# EAGLE board ninjaNIRS_TriggerBox_Rev1a (EAGLE 7.7.0)
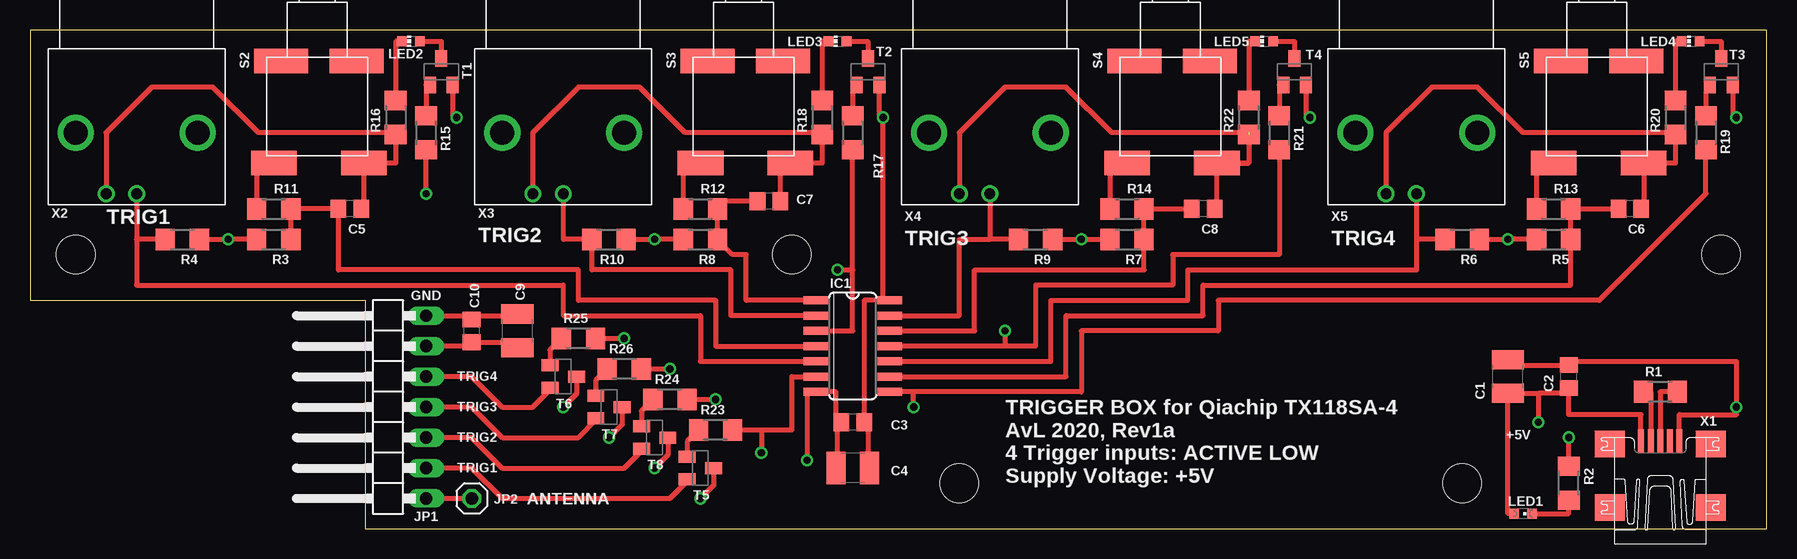
[diagram p0: board, top side]
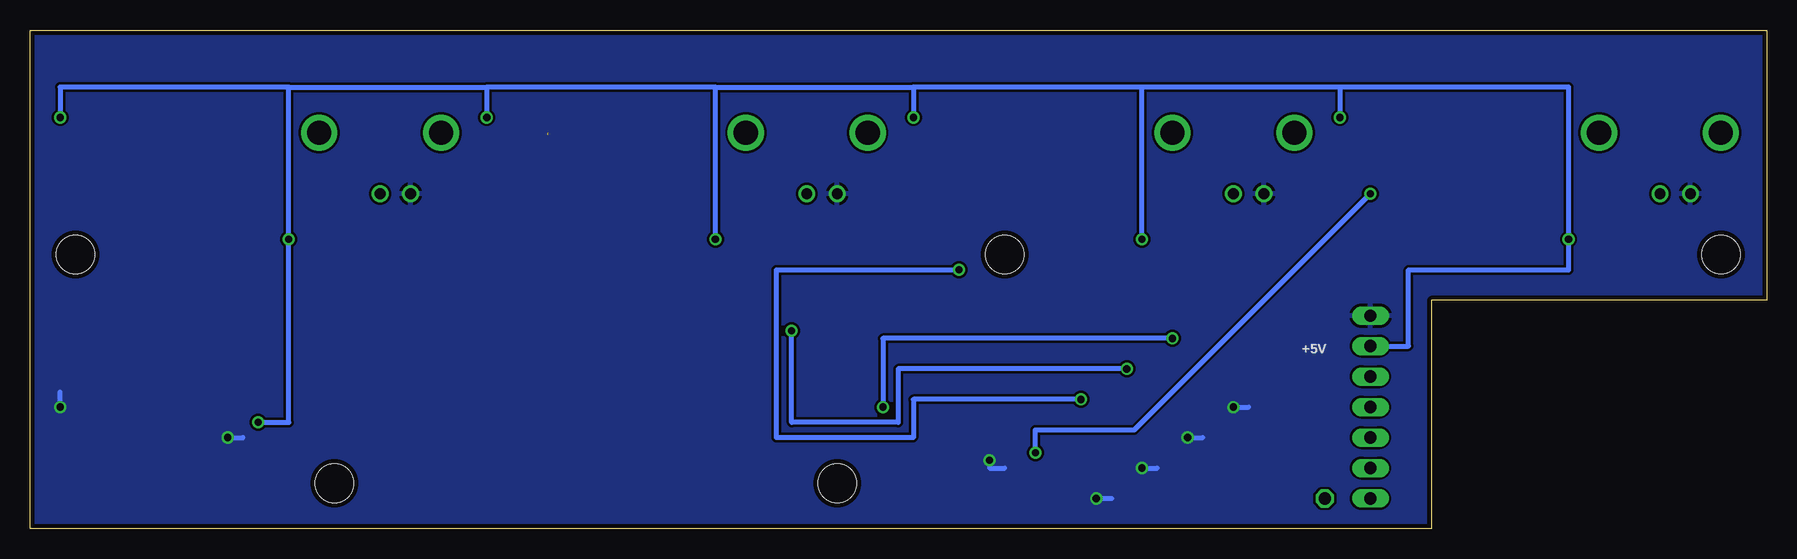
[diagram p1: board, bottom side, seen from below]

Size 144.76 x 41.58 mm. Coordinates in mm from the lower left corner, seen from the top.
Outline: 27.94,0 144.76,0 144.76,41.58 0,41.58 0,19.05 27.94,19.05 27.94,0
Copper layers (1*16): Top 0.035mm / dielectric 1.5mm / Bottom 0.035mm
Design rules "default *": minimum track width 10mil, minimum drill 12mil, track to track 8mil, track to pad 8mil, pad to pad 8mil, via to via 8mil, smd to smd 8mil, copper to edge 15mil, drill to drill 8mil, minimum pad ring 10mil, minimum via ring 8mil, stop-mask expansion 4mil, vias tented up to drill 0mil, thermal gap 10mil
Holes 3.2 mm at 3.81,22.86 140.97,22.86 63.5,22.86 77.47,3.81 119.38,3.81

## Footprints (pad centres in the part's own frame; a part is rotated, then mirrored left to right if it is on the bottom)
C1210 = smd 1.6 x 2.7: 1 -1.4,0; 2 1.4,0
C0805 = smd 1.3 x 1.5: 1 -0.95,0; 2 0.95,0
SO14 = smd 0.66 x 2.032: 1 -3.81,-3.073; 2 -2.54,-3.073; 3 -1.27,-3.073; 4 0,-3.073; 5 1.27,-3.073; 6 2.54,-3.073; 7 3.81,-3.073; 8 3.81,3.073; 9 2.54,3.073; 10 1.27,3.073; 11 0,3.073; 12 -1.27,3.073; 13 -2.54,3.073; 14 -3.81,3.073
1X07/90 = drill 1.016 long: 1 -7.62,-3.81; 2 -5.08,-3.81; 3 -2.54,-3.81; 4 0,-3.81; 5 2.54,-3.81; 6 5.08,-3.81; 7 7.62,-3.81
1X01 = drill 1.016 octagon: 1 0,0
CHIPLED_0603 = smd 0.8 x 0.8: A 0,-0.75; C 0,0.75
CHIP-LED0603 = smd 0.8 x 0.8: A 0,-0.75; C 0,0.75
R1206 = smd 1.6 x 1.803: 1 -1.422,0; 2 1.422,0
E-SWITCH_800BW = smd 3.81 x 2.03: P$1 -3.8,-3.8; P$2 3.692,-3.8 | smd 4.5 x 2.03: P$3 -3.2,4.692; P$4 3.092,4.692
SOT23-BEC = smd 1 x 1.4: B -0.95,-1.1; C 0,1.1; E 0.95,-1.1
UX60A-MB-5ST = smd 2 x 0.5: 1 2.25,1.6; 2 2.25,0.8; 3 2.25,0; 4 2.25,-0.8; 5 2.25,-1.6 | smd 2.2 x 2.5: M1 -3.3,-4.2; M2 -3.3,4.2; M3 2,4.2; M4 2,-4.2
TE_CON_BNC_5227161-9 = drill 2.01: P$1 0,0; P$2 10.16,0 | drill 0.89: P$3 2.54,-5.08; P$4 5.08,-5.08

## Placement (x,y rotation side)
C1  10uF  [C1210]  123.19,12.7 90 top
C2  100nF  [C0805]  128.27,12.7 90 top
C3  100nF  [C0805]  68.58,8.89 180 top
C4  10uF  [C1210]  68.58,5.08 180 top
C5  47n  [C0805]  26.67,26.67 180 top
C6  47n  [C0805]  133.35,26.67 180 top
C7  47n  [C0805]  61.59,27.3 180 top
C8  47n  [C0805]  97.79,26.67 180 top
C9  10uF  [C1210]  40.64,16.51 90 top
C10  100nF  [C0805]  36.83,16.51 90 top
IC1  SN74HCS08-Q1  [SO14]  68.58,15.24 270 top
JP1  CONN RCPT 7POS 0.1" GOLD PCB R/A  [1X07/90]  29.21,10.16 90 top
JP2  Antenna  [1X01]  36.83,2.54 0 top
LED1  LTST-C191KGKT  [CHIPLED_0603]  124.46,1.27 270 top
LED2  Kingbright APA1606QBC/D  [CHIP-LED0603]  31.75,40.64 90 top
LED3  Kingbright APA1606QBC/D  [CHIP-LED0603]  67.31,40.64 90 top
LED4  Kingbright APA1606QBC/D  [CHIP-LED0603]  138.43,40.64 90 top
LED5  Kingbright APA1606QBC/D  [CHIP-LED0603]  102.87,40.64 90 top
R1  100  [R1206]  135.89,11.43 0 top
R2  1k  [R1206]  128.27,3.81 270 top
R3  10k  [R1206]  20.32,24.13 180 top
R4  10k  [R1206]  12.7,24.13 180 top
R5  10k  [R1206]  127,24.13 180 top
R6  10k  [R1206]  119.38,24.13 180 top
R7  10k  [R1206]  91.44,24.13 180 top
R8  10k  [R1206]  55.88,24.13 180 top
R9  10k  [R1206]  83.82,24.13 180 top
R10  10k  [R1206]  48.26,24.13 180 top
R11  39  [R1206]  20.32,26.67 180 top
R12  39  [R1206]  55.88,26.67 180 top
R13  39  [R1206]  127,26.67 180 top
R14  39  [R1206]  91.44,26.67 180 top
R15  1k  [R1206]  33.02,33.02 90 top
R16  100  [R1206]  30.48,34.29 90 top
R17  1k  [R1206]  68.58,33.02 90 top
R18  100  [R1206]  66.04,34.29 90 top
R19  1k  [R1206]  139.7,33.02 90 top
R20  100  [R1206]  137.16,34.29 90 top
R21  1k  [R1206]  104.14,33.02 90 top
R22  100  [R1206]  101.6,34.29 90 top
R23  1k  [R1206]  57.15,8.26 0 top
R24  1k  [R1206]  53.34,10.79 0 top
R25  1k  [R1206]  45.72,15.88 0 top
R26  1k  [R1206]  49.53,13.34 0 top
S2  E-SWITCH-800BWSP9SM6RE  [E-SWITCH_800BW]  24.13,34.29 0 top
S3  E-SWITCH-800BWSP9SM6RE  [E-SWITCH_800BW]  59.69,34.29 0 top
S4  E-SWITCH-800BWSP9SM6RE  [E-SWITCH_800BW]  95.25,34.29 0 top
S5  E-SWITCH-800BWSP9SM6RE  [E-SWITCH_800BW]  130.81,34.29 0 top
T1  PNP MMBT3906  [SOT23-BEC]  34.29,38.1 0 top
T2  PNP MMBT3906  [SOT23-BEC]  69.85,38.1 0 top
T3  PNP MMBT3906  [SOT23-BEC]  140.97,38.1 0 top
T4  PNP MMBT3906  [SOT23-BEC]  105.41,38.1 0 top
T5  PNP MMBT3906  [SOT23-BEC]  55.88,5.08 270 top
T6  PNP MMBT3906  [SOT23-BEC]  44.45,12.7 270 top
T7  PNP MMBT3906  [SOT23-BEC]  48.26,10.16 270 top
T8  PNP MMBT3906  [SOT23-BEC]  52.07,7.62 270 top
X1  MINI-USB-UX60A-MB-5ST  [UX60A-MB-5ST]  135.89,5.08 90 top
X2  TE_CON_BNC_5227161-9  [TE_CON_BNC_5227161-9]  3.81,33.02 0 top
X3  TE_CON_BNC_5227161-9  [TE_CON_BNC_5227161-9]  39.37,33.02 0 top
X4  TE_CON_BNC_5227161-9  [TE_CON_BNC_5227161-9]  74.93,33.02 0 top
X5  TE_CON_BNC_5227161-9  [TE_CON_BNC_5227161-9]  110.49,33.02 0 top

## Library data of the parts
C1-C10 R1-R26 = rcl
IC1 = 74xx-eu
JP1 JP2 = pinhead
LED1-LED5 = led
S2-S5 = E-SWITCH-800BW
T1-T8 = transistor
X1 = con-hirose; OC_FARNELL: unknown; OC_NEWARK: unknown
X2-X5 = TE_CON_BNC_5227161-9

## Nets
+5V: C1.1 C2.1 C3.1 C4.1 C9.1 C10.1 IC1.14 JP1.6 LED1.A R3.2 R4.1 R5.2 R6.1 R7.2 R8.2 R9.1 R10.1 T1.E T2.E T3.E T4.E X1.1
GND: C1.2 C2.2 C3.2 C4.2 C5.1 C6.1 C7.1 C8.1 C9.2 C10.2 IC1.7 JP1.7 R2.1 R16.1 R18.1 R20.1 R22.1 S2.P$2 S3.P$2 S4.P$2 S5.P$2 T5.C T6.C T7.C T8.C X1.5 X2.P$3 X3.P$3 X4.P$3 X5.P$3
K1: JP1.2 T5.E
K1S: IC1.6 R15.1 R23.2
K2: JP1.3 T8.E
K2S: IC1.3 R17.1 R24.2
K3: JP1.4 T7.E
K3S: IC1.11 R21.1 R26.2
K4: JP1.5 T6.E
K4S: IC1.8 R19.1 R25.2
N$1: R1.1 X1.2
N$2: R1.2 X1.3
N$3: IC1.5 R4.2 X2.P$4
N$4: C5.2 IC1.4 R3.1 R11.1
N$5: IC1.10 R6.2 X5.P$4
N$6: IC1.2 R10.2 X3.P$4
N$7: IC1.13 R9.2 X4.P$4
N$8: C6.2 IC1.9 R5.1 R13.1
N$9: C7.2 IC1.1 R8.1 R12.1
N$10: R12.2 S3.P$1
N$11: R14.2 S4.P$1
N$12: R13.2 S5.P$1
N$13: LED1.C R2.2
N$14: R11.2 S2.P$1
N$15: C8.2 IC1.12 R7.1 R14.1
N$16: R15.2 T1.B
N$17: LED2.A T1.C
N$18: LED2.C R16.2
N$19: R17.2 T2.B
N$20: LED3.A T2.C
N$21: LED3.C R18.2
N$22: R19.2 T3.B
N$23: LED4.A T3.C
N$24: LED4.C R20.2
N$25: R21.2 T4.B
N$26: LED5.A T4.C
N$27: LED5.C R22.2
N$28: R23.1 T5.B
N$29: R25.1 T6.B
N$30: R26.1 T7.B
N$31: JP1.1 JP2.1
N$32: R24.1 T8.B

## Tracks (layer width: path | path; a pad name or v marks a point on that pad's centre or on a via)
+5V  (via drill 0.6)
  Top 0.406: T1.E 35.24,34.29 v35.56,34.29 | T2.E 70.8,34.29 v71.12,34.29 71.12,19.05 IC1.14 69.53,19.05 C3.1 69.85,8.57 69.85,5.08 C4.1 69.85,5.21 | T3.E 141.92,34.29 v142.24,34.29 | T4.E 106.36,34.29 v106.68,34.29 | R3.2 v16.51,24.13 R4.1 | R9.1 v87.63,24.13 R7.2 | R6.1 v123.19,24.13 R5.2 | X1.1 134.29,9.53 128.27,9.53 C2.1 128.27,11.3 125.73,11.3 | LED1.A 123.19,1.27 C1.1 125.73,11.3 | 125.73,11.3 v125.73,8.89 | JP1.6 36.7,15.24 C10.1 40.19,15.56 C9.1 | R10.1 v52.07,24.13 R8.2
  Bottom 0.406: 35.56,36.83 52.07,36.83 | 52.07,36.83 71.12,36.83 | 87.63,36.83 71.12,36.83 | 71.12,36.83 v71.12,34.29 | v52.07,24.13 52.07,36.83 | 35.56,36.83 16.51,36.83 v16.51,24.13 16.51,21.59 29.84,21.59 29.84,15.24 JP1.6 | 35.56,36.83 v35.56,34.29 | v87.63,24.13 87.63,36.83 | 123.19,36.83 v123.19,24.13 123.19,8.89 v125.73,8.89 | 123.19,36.83 142.24,36.83 v142.24,34.29 | 123.19,36.83 106.68,36.83 | 87.63,36.83 106.68,36.83 | 106.68,36.83 v106.68,34.29
GND  (via drill 0.6)  (1 unrouted)
  Top 0.406: R22.1 101.6,30.49 S4.P$2 98.94,30.36 | C6.1 134.5,26.67 S5.P$2 137.16,30.49 R20.1 137.16,33.02 124.46,33.02 120.65,36.83 116.84,36.83 113.03,33.02 X5.P$3 | C8.1 98.94,26.67 98.94,30.36 | C5.1 27.82,26.67 S2.P$2 29.21,30.49 29.21,30.48 30.48,30.48 R16.1 30.48,33.02 19.05,33.02 15.24,36.83 10.16,36.83 6.35,33.02 X2.P$3 | JP1.7 36.83,17.78 | C10.2 36.83,17.78 | 40.51,17.78 40.64,17.78 | 36.83,17.78 40.51,17.78 | 40.51,17.78 C9.2 | X3.P$3 41.91,33.02 45.72,36.83 50.8,36.83 54.61,33.02 66.04,33.02 R18.1 66.04,30.49 S3.P$2 62.55,29.65 C7.1 | X4.P$3 77.47,33.02 81.28,36.83 86.36,36.83 90.17,33.02 101.6,33.02 | 98.94,30.36 99.06,30.48 101.6,30.48 | X1.5 137.49,9.53 142.24,9.53 v142.24,10.16 142.24,13.97 128.59,13.97 C2.2 123.19,13.65 C1.2 | R2.1 v128.27,7.62 | v64.77,5.71 64.77,11.43 IC1.7 67.18,11.43 67.18,9.34 C3.2 67.31,8.89 67.31,5.21 C4.2 | T6.C 45.55,11.26 v44.45,10.16 | T7.C 49.36,8.72 v48.26,7.62 | T8.C 53.17,6.18 v52.07,5.08 | T5.C 56.98,3.64 v55.88,2.54
  Bottom 0.406: v142.24,10.16 142.24,11.43 | v128.27,7.62 127,7.62 | v64.77,5.71 64.77,5.08 63.5,5.08 | v44.45,10.16 43.18,10.16 | v48.26,7.62 46.99,7.62 | v52.07,5.08 50.8,5.08 | v55.88,2.54 54.61,2.54
  pour Bottom: 0,41.91 144.78,41.91 144.78,0 27.94,0 27.94,19.05 0,19.05
K1
  Top 0.406: JP1.2 36.83,5.08 39.37,2.54 53.34,2.54 54.78,3.98 T5.E
K1S  (via drill 0.6)
  Top 0.406: IC1.6 63.5,12.7 63.5,8.26 R23.2 60.96,8.26 v60.96,6.35 | v33.02,27.94 R15.1
  Bottom 0.406: v60.96,6.35 60.96,8.26 52.7,8.26 v33.02,27.94
K2
  Top 0.406: JP1.3 36.83,7.62 39.37,5.08 49.53,5.08 50.97,6.52 T8.E
K2S  (via drill 0.6)
  Top 0.406: IC1.3 68.58,16.51 68.58,21.59 | 68.58,21.59 R17.1 | R24.2 v57.15,10.79 | v67.31,21.59 68.58,21.59
  Bottom 0.406: v57.15,10.79 71.12,10.79 71.12,7.62 82.55,7.62 82.55,21.59 v67.31,21.59
K3
  Top 0.406: JP1.4 36.83,10.16 39.37,7.62 45.72,7.62 47.16,9.06 T7.E
K3S  (via drill 0.6)
  Top 0.406: R21.1 104.14,22.86 95.25,22.86 95.25,20.32 83.82,20.32 83.82,15.24 81.28,15.24 | 81.28,15.24 IC1.11 | R26.2 v53.34,13.34 | v81.28,16.51 81.28,15.24
  Bottom 0.406: v53.34,13.34 72.39,13.34 72.39,8.89 81.28,8.89 v81.28,16.51
K4
  Top 0.406: JP1.5 36.83,12.7 39.37,10.16 41.91,10.16 43.35,11.6 T6.E
K4S  (via drill 0.6)
  Top 0.406: 73.66,11.43 87.63,11.43 87.63,16.51 99.06,16.51 99.06,19.05 130.81,19.05 139.7,27.94 R19.1 | 73.66,11.43 IC1.8 | R25.2 v49.53,15.88 | v73.66,10.16 73.66,11.43
  Bottom 0.406: v49.53,15.88 73.66,15.88 v73.66,10.16
N$1
  Top 0.406: R1.1 135.09,11.43 X1.2
N$2
  Top 0.406: R1.2 135.89,11.43 X1.3
N$3
  Top 0.406: X2.P$4 8.89,24.13 | 8.89,24.13 8.89,20.32 44.45,20.32 44.45,17.78 55.88,17.78 55.88,13.97 IC1.5 | R4.2 8.89,24.13
N$4
  Top 0.406: R3.1 R11.1 C5.2 25.72,21.59 45.72,21.59 45.72,19.05 57.15,19.05 57.15,15.24 IC1.4
N$5
  Top 0.406: X5.P$4 115.57,24.13 | 115.57,24.13 115.57,21.59 96.52,21.59 96.52,19.05 85.09,19.05 85.09,13.97 IC1.10 | R6.2 115.57,24.13
N$6
  Top 0.406: X3.P$4 44.45,24.13 R10.2 46.84,21.59 58.42,21.59 58.42,17.78 IC1.2
N$7
  Top 0.406: X4.P$4 80.01,24.13 | R9.2 80.01,24.13 | IC1.13 77.47,17.78 77.47,24.13 80.01,24.13
N$8
  Top 0.406: C6.2 R13.1 R5.1 128.42,20.32 97.79,20.32 97.79,17.78 86.36,17.78 86.36,12.7 IC1.9
N$9
  Top 0.406: IC1.1 59.69,19.05 59.69,22.86 58.57,22.86 R8.1 R12.1 57.94,27.3 C7.2
N$10
  Top 0.406: S3.P$1 54.46,30.49 R12.2
N$11
  Top 0.406: S4.P$1 90.02,30.49 R14.2
N$12
  Top 0.406: S5.P$1 125.58,30.49 R13.2
N$13
  Top 0.406: LED1.C 128.27,1.27 R2.2
N$14
  Top 0.406: S2.P$1 18.9,30.49 R11.2
N$15
  Top 0.406: C8.2 R14.1 R7.1 92.86,21.59 78.74,21.59 78.74,16.51 IC1.12
N$16
  Top 0.406: T1.B 33.02,37 R15.2 33.02,34.29
N$17
  Top 0.406: LED2.A 34.29,40.64 T1.C
N$18
  Top 0.406: LED2.C 30.48,40.64 R16.2
N$19
  Top 0.406: T2.B 68.58,37 R17.2
N$20
  Top 0.406: LED3.A 69.85,40.64 T2.C
N$21
  Top 0.406: LED3.C 66.04,40.64 R18.2
N$22
  Top 0.406: T3.B 139.7,37 R19.2 139.7,34.29
N$23
  Top 0.406: LED4.A 140.97,40.64 T3.C
N$24
  Top 0.406: LED4.C 137.16,40.64 R20.2
N$25
  Top 0.406: T4.B 104.14,37 R21.2
N$26
  Top 0.406: LED5.A 105.41,40.64 T4.C
N$27
  Top 0.406: LED5.C 101.6,40.64 R22.2
N$28
  Top 0.406: R23.1 54.78,7.31 T5.B
N$29
  Top 0.406: R25.1 43.35,14.93 T6.B
N$30
  Top 0.406: R26.1 47.16,12.39 T7.B
N$31
  Top 0.406: JP1.1 JP2.1
N$32
  Top 0.406: R24.1 50.97,9.85 T8.B

## Text on the board
tNames: TRIG1 | TRIG2 | TRIG3 | TRIG4 | GND | TRIG4 | TRIG3 | +5V | TRIG2 | TRIG1 | TRIGGER BOX for Qiachip TX118SA-4 / AvL 2020, Rev1a / 4 Trigger inputs: ACTIVE LOW / Supply Voltage: +5V | ANTENNA
bNames: +5V